# Altium PCB PIPOCPUG_2006.PCBDOC (part 6 of 6)
Units mil, origin at the board's own origin, x right, y up, seen from the top; angles counter-clockwise.
Board outline 8500 x 4525 mil, 2 copper layers (Top Layer, Top, Bottom Layer, Bottom); 346 components, 259 nets, 1117 pads, 618 vias.
Unrouted connection lines stored in the file: 782.
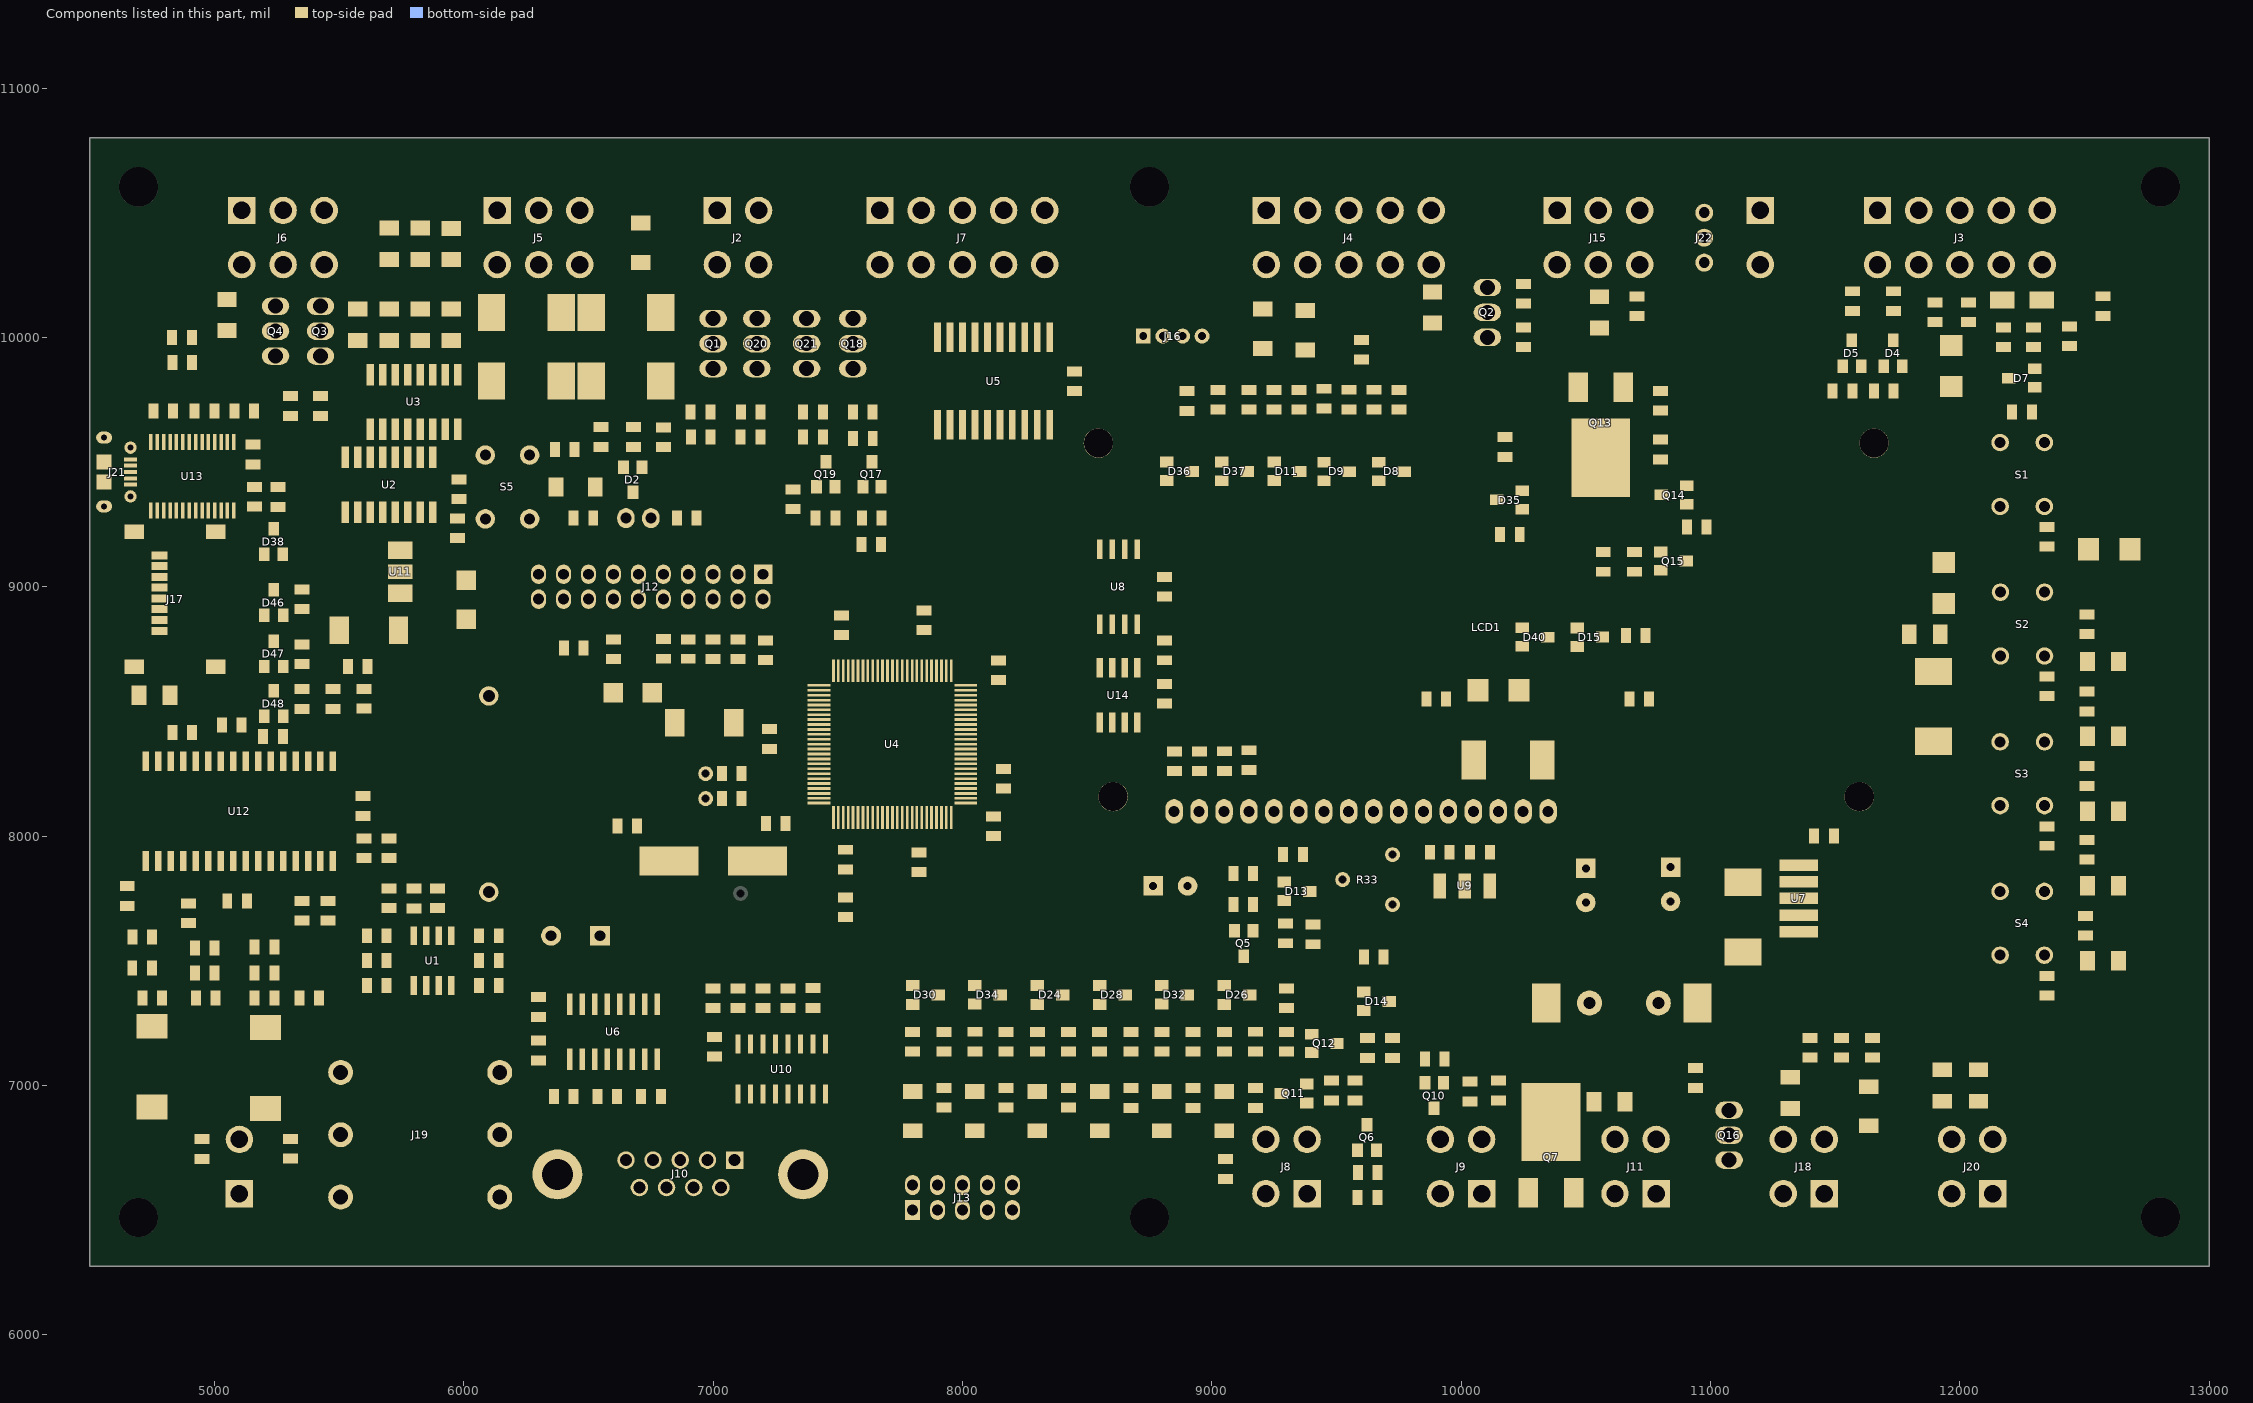
[diagram p6: the components of this part, seen from the top]

## Silkscreen, mask and mechanical layers (free items; w line width, h text height) (continued)
Drill Drawing, Drill:
  lines w16: 7385,13948 9096,13948 ; 7385,14114 9096,14114 ; 7514,13367 7614,13367 ; 7514,13583 7564,13533 ; 7514,13649 7614,13749 ; 7514,13749 7614,13649 ; 7514,13865 7614,13865 ; 7539,12396 7564,12371 7589,12396 ; 7564,12703 7564,12753 ; 7564,12869 7564,12919 ; 7564,13317 7564,13367 ; 7564,13483 7564,13533 ; 7564,13815 7564,13915 ; 7614,13583 7564,13533 ; 7744,12288 7744,14114 ; 8298,12288 8298,14114 ; 7514,12587 7564,12537 7614,12587 ; 7514,12587 7514,12487 7614,12487 7614,12587 ; 7514,12587 7614,12587 ; 7564,12753 7514,12703 7564,12653 7614,12703 7564,12753 ; 7385,12288 9096,12288 9096,14280 7385,14280 7385,12288 ; 7514,12371 7564,12321 7614,12371 7564,12421 7514,12371 ; 7514,12819 7514,12919 7614,12919 7614,12819 7514,12819 ; 7514,12985 7614,13085 7614,12985 7514,13085 7514,12985 ; 7514,13151 7614,13251 7514,13251 7614,13151 7514,13151
  text "GA0078  215,9 x 114,9 mm" at 7515,14138 h64.38
  text "SYM" at 7416,13948 h95
  text "COUNT" at 7775,13948 h95
  text "SIZE(mm)" at 8327,13948 h95
  text "610" at 7980,13782 h95
  text "0.41" at 8613,13782 h95
  text "12" at 8076,13616 h95
  text "0.61" at 8613,13616 h95
  text "16" at 8076,13450 h95
  text "0.81" at 8613,13450 h95
  text "73" at 8076,13284 h95
  text "1.12" at 8613,13284 h95
  text "13" at 8076,13118 h95
  text "1.22" at 8613,13118 h95
  text "30" at 8076,12952 h95
  text "1.52" at 8613,12952 h95
  text "76" at 8076,12786 h95
  text "1.78" at 8613,12786 h95
  text "4" at 8171,12620 h95
  text "2.97" at 8613,12620 h95
  text "2" at 8171,12454 h95
  text "3.15" at 8613,12454 h95
  text "6" at 8171,12288 h95
  text "3.99" at 8613,12288 h95
  text "Observar rasgos em J21" at 7390,12041 h83.75
  text "Placa Face Dupla, e=1,6mm; 0,5 Ozft2" at 7125,11889 h75.62

## Text inside footprints (layer, text, board x,y; h text height)
C36: Top Overlay, Top Silk "+" at 10284,7960 h60.62 r270
C38: Top Overlay, Top Silk "+" at 10909,7990 h60.62 r270
C40: Top Overlay, Top Silk "+" at 8612,7743 h60.62
C54: Top Overlay, Top Silk "+" at 5469,8871 h49.38
C56: Top Overlay, Top Silk "+" at 6730,8418 h49.38
J17: Top Overlay, Top Silk "CARTAO" at 4554,9046 h30 r270
J19: Top Overlay, Top Silk "-->" at 5882,6425 h83.75 r90; Top Overlay, Top Silk "borda da placa" at 5607,6283 h37.5